# EAGLE board Sending end (EAGLE 6.3)
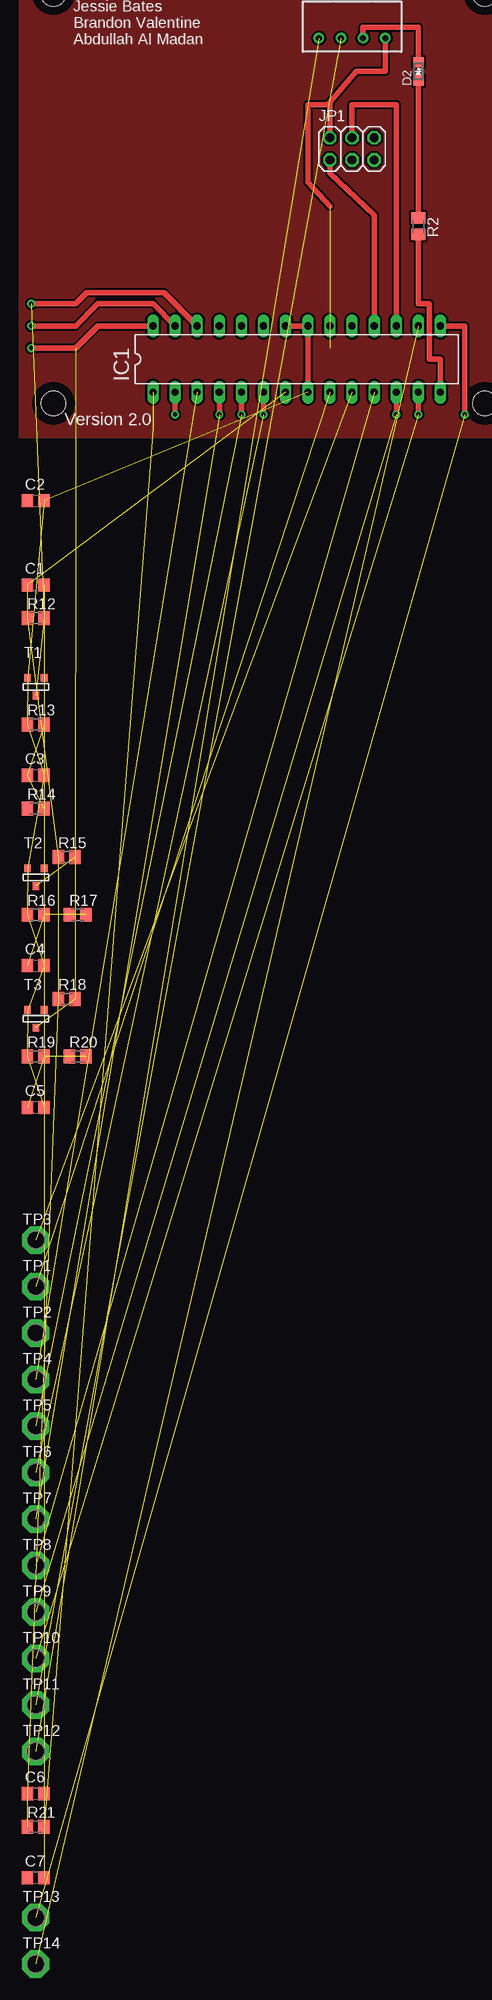
[diagram p0: board, top side]
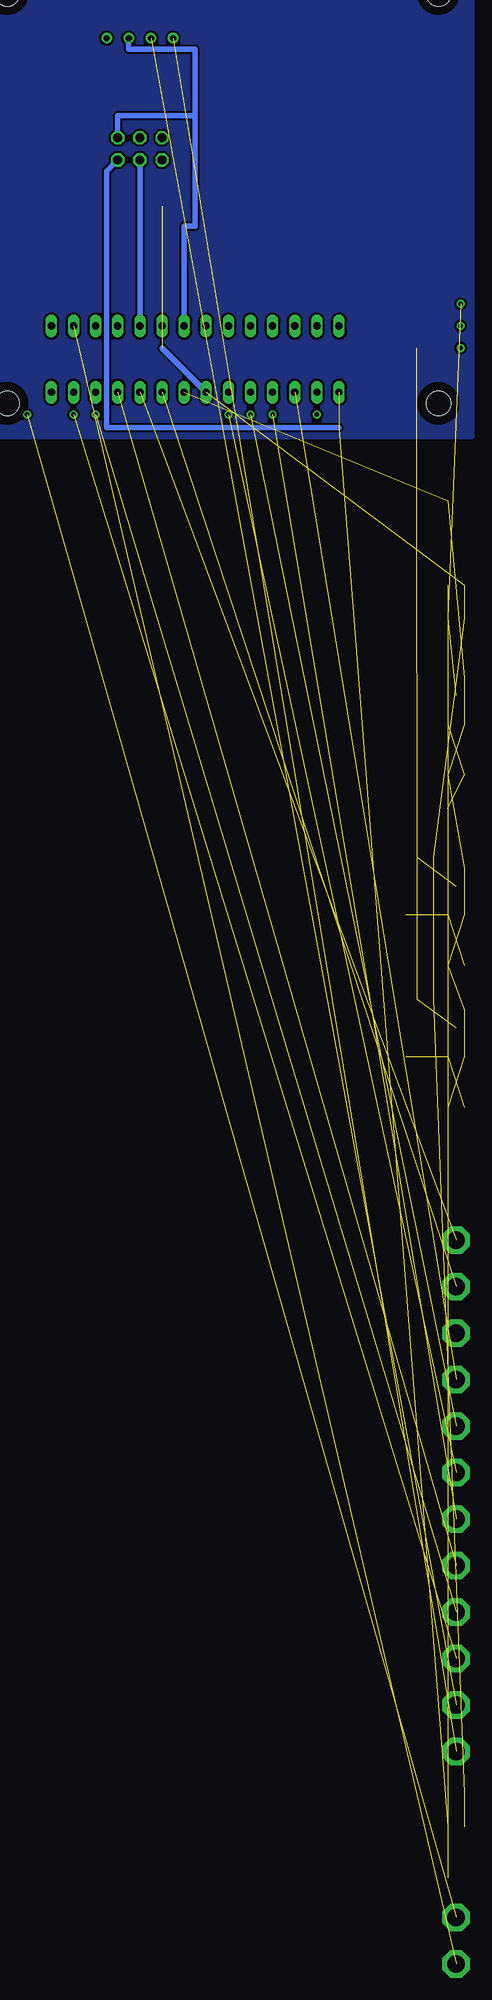
[diagram p1: board, bottom side, seen from below]

No outline drawn. Coordinates in mm, seen from the top.
Copper layers (1+16): Top 1mm / dielectric 1.5mm / Bottom 1mm
Design rules "default *": minimum track width 10mil, minimum drill 24mil, track to track 7mil, track to pad 7mil, pad to pad 7mil, via to via 7mil, smd to smd 7mil, copper to edge 40mil, drill to drill 8mil, minimum pad ring 10mil, minimum via ring 8mil, stop-mask expansion 4mil, vias tented up to drill 0mil, thermal gap 10mil
Holes 2.8 mm at 3.81,50.8 3.81,3.81 53.34,3.81 53.34,50.8

## Footprints (pad centres in the part's own frame; a part is rotated, then mirrored left to right if it is on the bottom)
TME = drill 0.7 pad 1.1: 1 -3.81,0; 2 -1.27,0; 3 1.27,0; 4 3.81,0
C0805 = smd 1.3 x 1.5: 1 -0.95,0; 2 0.95,0
HSMXC670 = smd 1.2 x 1.2: A -1.05,0; K 1.05,0
DIL28-3 = drill 0.813 long: 1 -16.51,-3.81; 2 -13.97,-3.81; 3 -11.43,-3.81; 4 -8.89,-3.81; 5 -6.35,-3.81; 6 -3.81,-3.81; 7 -1.27,-3.81; 8 1.27,-3.81; 9 3.81,-3.81; 10 6.35,-3.81; 11 8.89,-3.81; 12 11.43,-3.81; 13 13.97,-3.81; 14 16.51,-3.81; 15 16.51,3.81; 16 13.97,3.81; 17 11.43,3.81; 18 8.89,3.81; 19 6.35,3.81; 20 3.81,3.81; 21 1.27,3.81; 22 -1.27,3.81; 23 -3.81,3.81; 24 -6.35,3.81; 25 -8.89,3.81; 26 -11.43,3.81; 27 -13.97,3.81; 28 -16.51,3.81
2X03 = drill 1.016 octagon: 1 -2.54,-1.27; 2 -2.54,1.27; 3 0,-1.27; 4 0,1.27; 5 2.54,-1.27; 6 2.54,1.27
M0805 = smd 1.3 x 1.6: 1 -0.95,0; 2 0.95,0
SOT-23 = smd 0.787 x 0.889: 1 0.025,-1.016; 2 -0.94,1.016; 3 0.991,1.016
P1-20 = drill 2.007 pad 3.15 octagon: TP 0,0

## Placement (x,y rotation side)
12V-5VDCDCCONVERTER  TME1205S  [TME]  38.1,45.72 0 top
C1  [C0805]  1.78,-17.02 0 top
C2  [C0805]  1.78,-7.37 0 top
C3  [C0805]  1.78,-38.86 0 top
C4  [C0805]  1.78,-60.71 0 top
C5  [C0805]  1.78,-76.96 0 top
C6  [C0805]  1.78,-155.7 0 top
C7  [C0805]  1.78,-165.35 0 top
D2  HSMXC670  [HSMXC670]  45.72,41.91 90 top
IC1  MEGA8-P  [DIL28-3]  31.75,8.89 0 top
JP1  [2X03]  38.1,33.02 0 top
R2  tbd  [M0805]  45.72,24.13 270 top
R12  tbd  [M0805]  1.78,-20.83 0 top
R13  tbd  [M0805]  1.78,-33.02 0 top
R14  tbd  [M0805]  1.78,-42.67 0 top
R15  tbd  [M0805]  5.33,-48.26 0 top
R16  tbd  [M0805]  1.78,-54.86 0 top
R17  tbd  [M0805]  6.6,-54.86 0 top
R18  tbd  [M0805]  5.33,-64.52 0 top
R19  tbd  [M0805]  1.78,-71.12 0 top
R20  tbd  [M0805]  6.6,-71.12 0 top
R21  10k  [M0805]  1.78,-159.51 0 top
T1  [SOT-23]  1.78,-28.7 0 top
T2  [SOT-23]  1.78,-50.55 0 top
T3  [SOT-23]  1.78,-66.8 0 top
TP1  PTR1PAD1-20  [P1-20]  1.78,-97.54 0 top
TP2  PTR1PAD1-20  [P1-20]  1.78,-102.87 0 top
TP3  PTR1PAD1-20  [P1-20]  1.78,-92.2 0 top
TP4  PTR1PAD1-20  [P1-20]  1.78,-108.2 0 top
TP5  PTR1PAD1-20  [P1-20]  1.78,-113.54 0 top
TP6  PTR1PAD1-20  [P1-20]  1.78,-118.87 0 top
TP7  PTR1PAD1-20  [P1-20]  1.78,-124.21 0 top
TP8  PTR1PAD1-20  [P1-20]  1.78,-129.54 0 top
TP9  PTR1PAD1-20  [P1-20]  1.78,-134.87 0 top
TP10  PTR1PAD1-20  [P1-20]  1.78,-140.21 0 top
TP11  PTR1PAD1-20  [P1-20]  1.78,-145.54 0 top
TP12  PTR1PAD1-20  [P1-20]  1.78,-150.88 0 top
TP13  PTR1PAD1-20  [P1-20]  1.78,-169.93 0 top
TP14  PTR1PAD1-20  [P1-20]  1.78,-175.26 0 top

## Library data of the parts
12V-5VDCDCCONVERTER = traco-electronic; MPN: TME 1205S; OC_FARNELL: 1007542; OC_NEWARK: 51R5325
C1-C7 = rcl
D2 = opto-transmittter-hp; OC_FARNELL: unknown; OC_NEWARK: unknown
IC1 = atmel; OC_FARNELL: unknown; OC_NEWARK: unknown
JP1 = pinhead
R2 R12-R21 = resistor
T1-T3 = zetex; OC_FARNELL: unknown; OC_NEWARK: unknown
TP1-TP14 = testpad

## Nets
AVCC: IC1.20
GND: 12V-5VDCDCCONVERTER.3 C2.2 C3.2 C4.2 C5.2 C7.2 D2.K IC1.8 IC1.21 IC1.22 JP1.6 R13.1 R16.1 R19.1 T1.2 T2.2 T3.2
LEFT: R17.1
N$1: IC1.5 TP5.TP
N$6: D2.A R2.1
N$7: IC1.1 JP1.5 R21.2
N$11: C3.1 R13.2 R14.2 T1.3
N$12: IC1.9 TP1.TP
N$13: IC1.28 R18.2 T3.1
N$14: IC1.2
N$15: IC1.3 TP4.TP
N$16: IC1.4 TP7.TP
N$17: IC1.6 TP6.TP
N$18: IC1.12 TP9.TP
N$19: IC1.13 TP10.TP
N$20: IC1.14 R2.2
N$21: IC1.15 TP13.TP
N$22: IC1.16 TP14.TP
N$23: IC1.17 JP1.4
N$24: IC1.18 JP1.1
N$25: IC1.19 JP1.3
N$27: 12V-5VDCDCCONVERTER.2 TP11.TP
N$28: 12V-5VDCDCCONVERTER.1 TP12.TP
N$31: C1.2 C6.2
N$34: C4.1 R16.2 R17.2 T2.3
N$35: R15.2 T2.1
N$37: C5.1 R19.2 R20.2 T3.3
N$39: IC1.10 TP3.TP
N$40: IC1.11 TP8.TP
N$41: IC1.26 R12.2 T1.1
N$42: IC1.27
RIGHT: R14.1
STOP: R20.1
VCC: 12V-5VDCDCCONVERTER.4 C1.1 C6.1 IC1.7 JP1.2 R12.1 R15.1 R18.1 R21.1
VCC1: C7.1

## Tracks (layer width: path | path; a pad name or v marks a point on that pad's centre or on a via)
GND  (11 unrouted)
  Top 0.61: 12V-5VDCDCCONVERTER.3 39.37,46.99 45.72,46.99 D2.K | IC1.22 IC1.21 IC1.8
  Bottom 0.61: JP1.6 40.64,36.83 31.75,36.83 | 12V-5VDCDCCONVERTER.3 39.37,44.45 31.75,44.45 31.75,40.64 31.75,36.83 | IC1.21 33.02,24.13 31.75,24.13 31.75,25.4 31.75,34.29 31.75,36.83
N$1  (via drill 0.5)  (1 unrouted)
  Top 0.61: IC1.5 v25.4,2.54
N$4
  pour Bottom (isolate 0.254, hatched): 0,54.61 0,0 57.15,0 57.15,53.34 57.15,54.61
N$6
  Top 0.61: R2.1 D2.A
N$7  (2 unrouted)
  Bottom 0.61: 15.24,1.02 30.99,1.02 41.91,1.02 41.91,15.24 41.91,30.48 JP1.5
N$9
  pour Top (isolate 0.254, hatched): 0,54.61 0,0 57.15,0 57.15,54.61
N$11  (3 unrouted)
N$12  (1 unrouted)
N$13  (via drill 0.5)  (2 unrouted)
  Top 0.61: IC1.28 8.89,12.7 6.35,10.16 v1.27,10.16
N$14  (via drill 0.5)
  Top 0.61: IC1.2 v17.78,2.54
N$15  (1 unrouted)
N$16  (via drill 0.5)  (1 unrouted)
  Top 0.61: IC1.4 v22.86,2.54
N$17  (via drill 0.5)  (1 unrouted)
  Top 0.61: IC1.6 v27.94,2.54
N$18  (via drill 0.5)  (1 unrouted)
  Top 0.61: IC1.12 v43.18,2.54
N$19  (via drill 0.5)  (1 unrouted)
  Top 0.61: IC1.13 v45.72,2.54
N$20
  Top 0.61: IC1.14 48.26,8.89 46.99,8.89 46.99,15.24 45.72,15.24 R2.2
N$21  (via drill 0.5)  (1 unrouted)
  Top 0.61: IC1.15 51.05,12.7 v51.05,2.54
N$22  (1 unrouted)
N$23
  Top 0.61: JP1.4 38.1,38.1 43.18,38.1 IC1.17
N$24
  Top 0.61: JP1.1 35.56,30.23 40.64,25.4 IC1.18
N$25
  Bottom 0.61: JP1.3 IC1.19
N$27  (1 unrouted)
N$28  (1 unrouted)
N$31  (1 unrouted)
N$34  (3 unrouted)
N$35  (1 unrouted)
N$37  (3 unrouted)
N$39  (1 unrouted)
N$40  (1 unrouted)
N$41  (via drill 0.5)  (2 unrouted)
  Top 0.61: IC1.26 16.51,16.51 7.62,16.51 6.35,15.24 v1.27,15.24
N$42  (via drill 0.5)
  Top 0.61: IC1.27 15.24,15.24 8.89,15.24 6.35,12.7 v1.27,12.7
VCC  (7 unrouted)
  Top 0.61: 12V-5VDCDCCONVERTER.4 41.91,41.91 38.61,41.91 35.56,38.35 JP1.2 35.56,38.1 33.02,38.1 33.02,29.21 35.56,26.42
  Bottom 0.61: 35.56,10.16 IC1.7

## Text on the board
tPlace: Night Rider: Transmission Board | Solomon Cooper / Jessie Bates / Brandon Valentine / Abdullah Al Madan | Version 2.0